# Altium PCB LM-003.PcbDoc
Units mil, origin at the board's own origin, x right, y up, seen from the top; angles counter-clockwise.
Board outline 2625 x 8500 mil, 8 copper layers (Top Layer, Mid-Layer 1, Internal Plane 1, Internal Plane 2, Internal Plane 3, Internal Plane 4, Mid-Layer 2, Bottom Layer), stack 49 mil thick; 1 components, 284 nets, 8 pads, 0 vias.
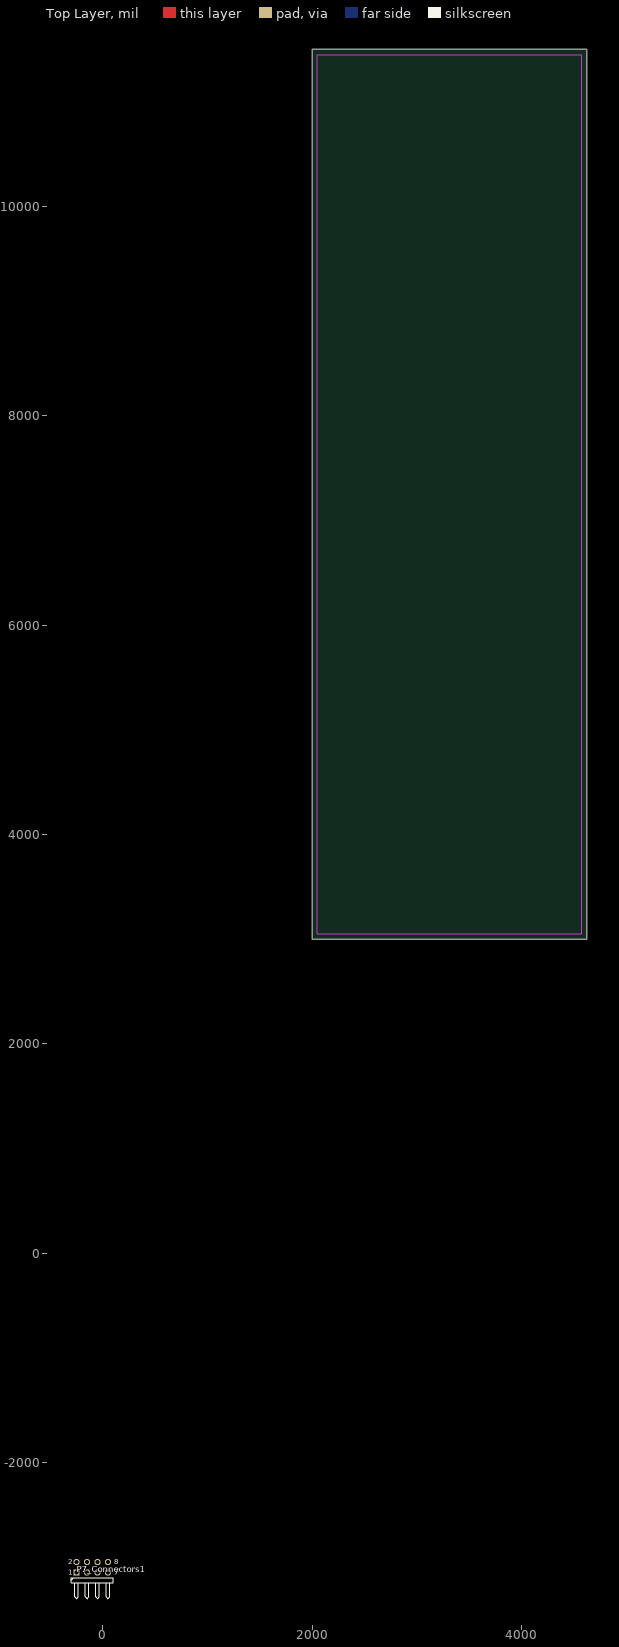
[diagram p0: Top Layer view]
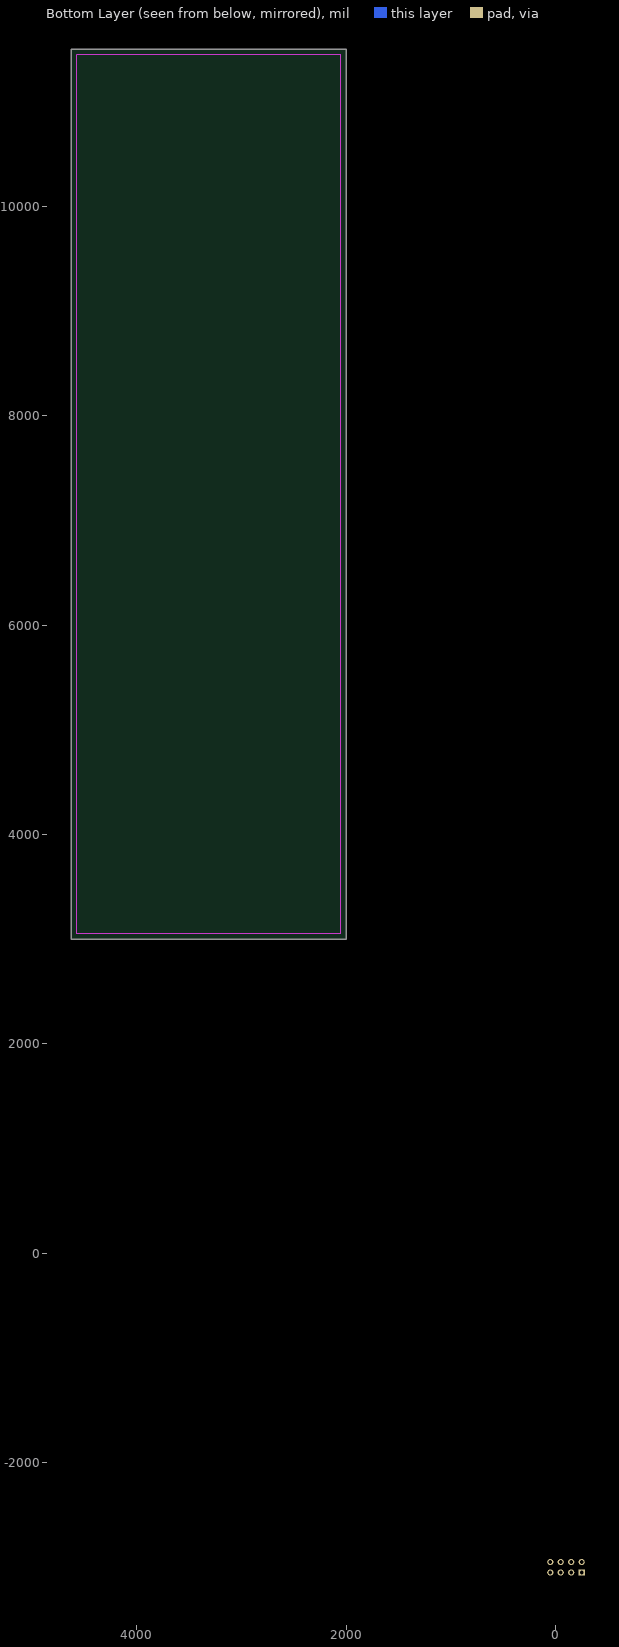
[diagram p1: Bottom Layer view, seen from below]
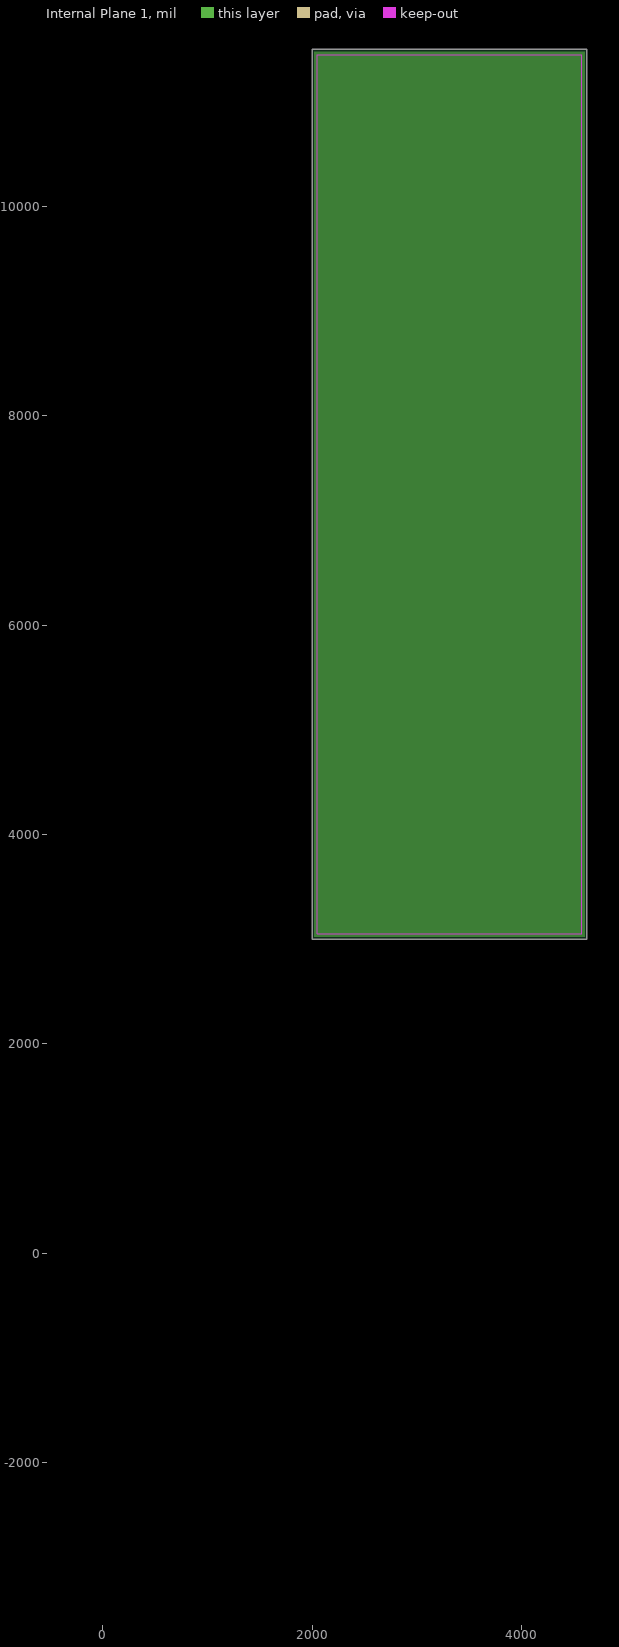
[diagram p2: Internal Plane 1, clearances drawn from the general rule]
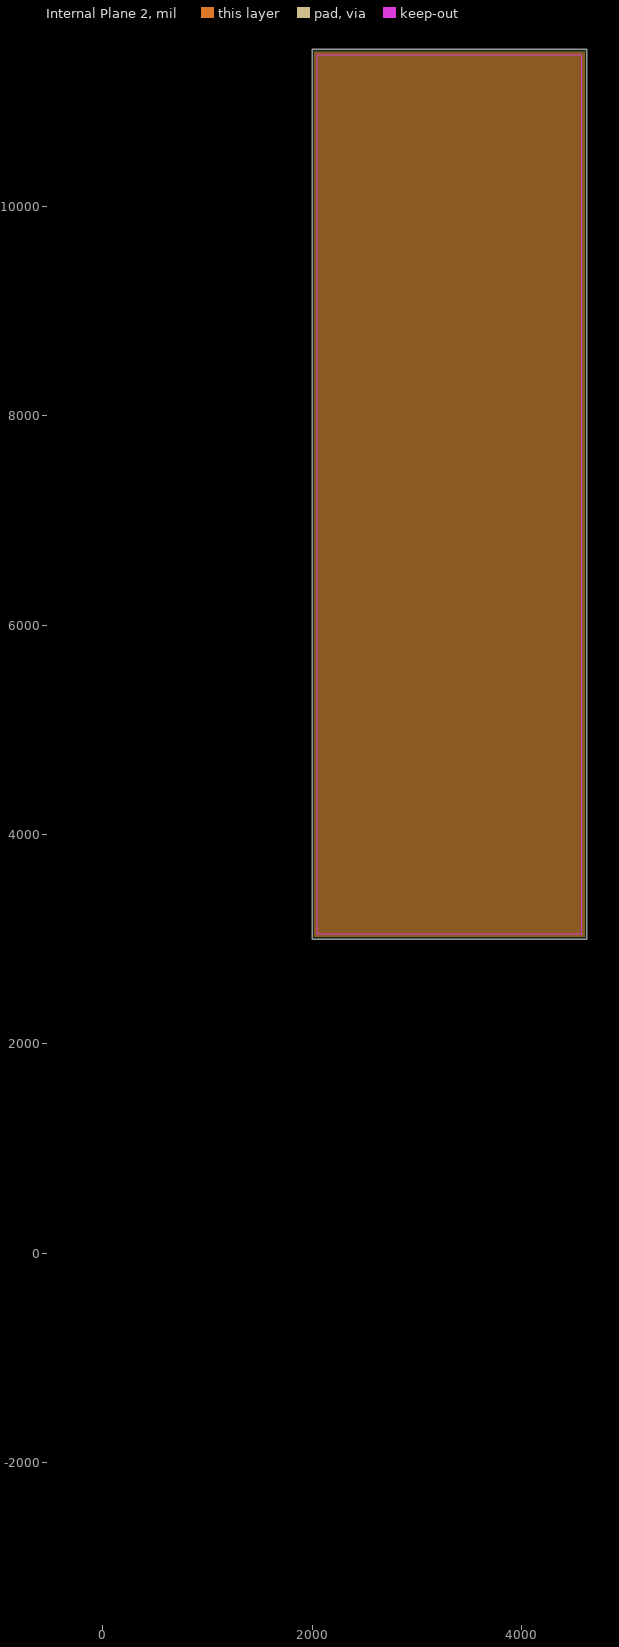
[diagram p3: Internal Plane 2, clearances drawn from the general rule]
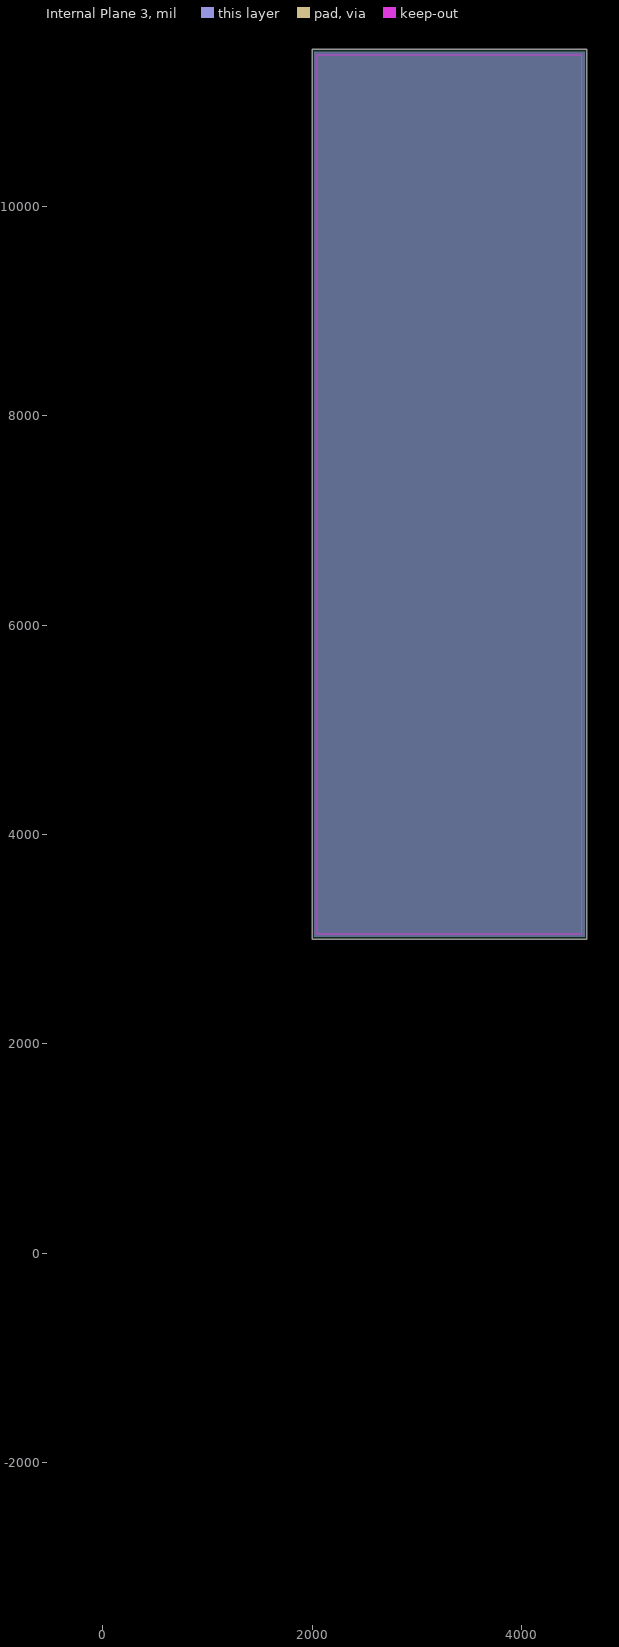
[diagram p4: Internal Plane 3, clearances drawn from the general rule]
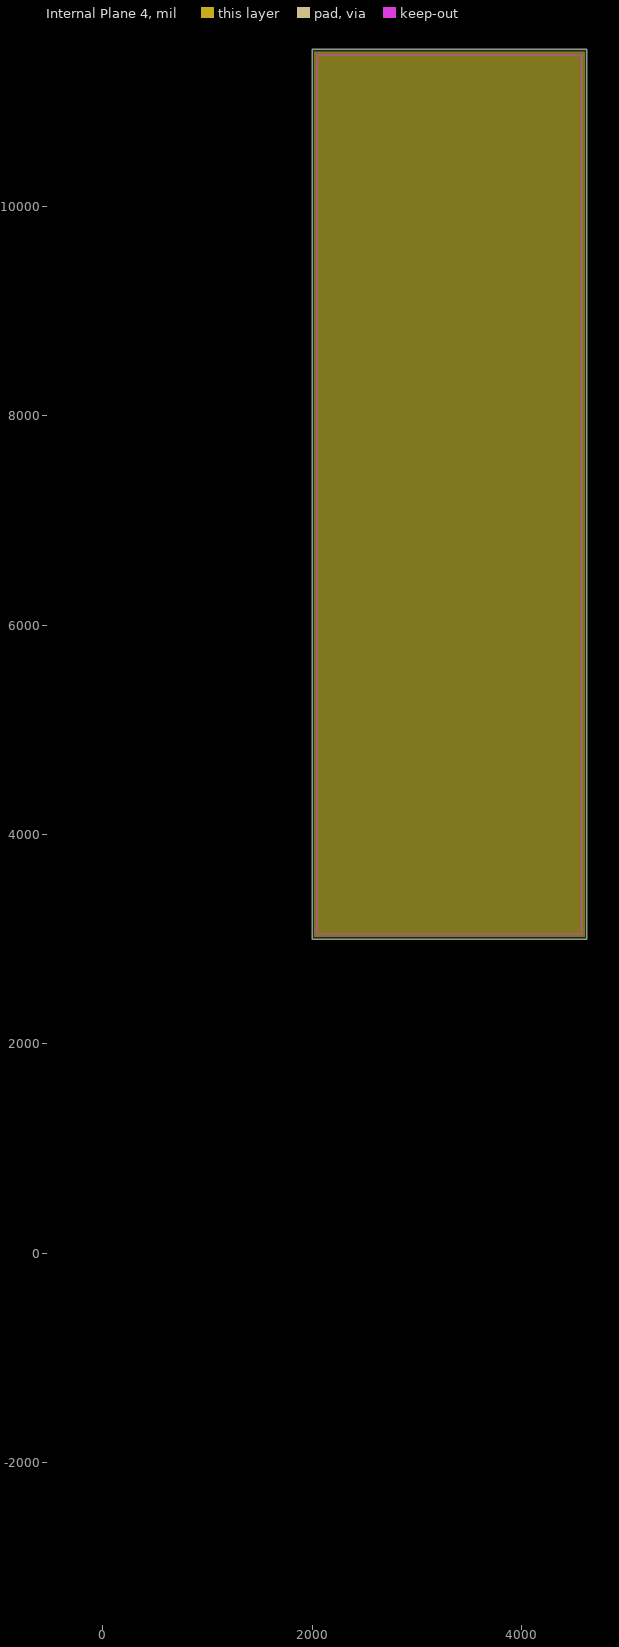
[diagram p5: Internal Plane 4, clearances drawn from the general rule]

## Layer stack, top to bottom
Top Solder: solder mask 0.4, Solder Resist, Dk 3.5
Top Layer: signal copper 1.4
Dielectric 1: dielectric 12.6, FR-4, Dk 4.8
Mid-Layer 1: signal copper 1.4
Internal Plane 1: plane copper 1.4
Internal Plane 2: plane copper 1.4
Internal Plane 3: plane copper 1.4
Internal Plane 4: plane copper 1.4
Dielectric2: dielectric 12.6, FR-4, Dk 4.8
Mid-Layer 2: signal copper 1.4
Dielectric3: dielectric 12.6, FR-4, Dk 4.8
Bottom Layer: signal copper 1.4
Bottom Solder: solder mask 0.4, Solder Resist, Dk 3.5

## Board outline
2000,3000 4625,3000 4625,11500 2000,11500

## Design rules (kind name [scope] priority, off if disabled: settings)
Clearance [All] p1: gap=8 ignorepadtopadclearanceinfootprint=FALSE
PlaneClearance [All] p1: clearance=20
PlaneConnect [All] p1: planeconnectstyle=Relief reliefexpansion=20 reliefentries=4 reliefconductorwidth=10 reliefairgap=10
PolygonConnect [All] p1: connectstyle=Relief reliefconductorwidth=10 reliefentries=4 polygonreliefangle="90 Angle" airgapwidth=10
RoutingVias [All] p1: holewidth=25 width=40 viastyle="Through Hole" minholewidth=28 minwidth=50 maxholewidth=28 maxwidth=50
SolderMaskExpansion [All] p1: expansion=4
Width [All] p1: maxlimit=8 minlimit=8 preferedwidth=8
28 further rules are at their usual default settings.

## Classes and differential pairs
channel class "Power Monitor": "Power Monitor1" "Power Monitor2"
channel class heater_control: Designator "Heater Control"
channel class Connectors: Connectors1 Connectors2 I2C
channel class ADC: ADC1 ADC2

## Components (designator, comment, footprint, x,y, rotation, side; value= is the part's Value field where it differs from the comment)
P7_Connectors1 "IPL1-104-01-L-S-RA-K" HDR2X4H -250,-3050 r0 top (schematic designator P7)

## Footprints (in the part's own frame and the unit in brackets; to place one, negate y for a bottom-side part, rotate by r counter-clockwise, add the part's x,y. Pads: shape width x height; smd on the part's side, far side on the other; paste and mask are expansions set on the pad)
HDR2X4H [mm] "Connector; Header; 4x2 Position; Right Angle"
  rect 1.5x1.5 hole 0.9: 1(0,0)
  round 1.5 hole 0.9: 2(0,2.54) 3(2.54,0) 4(2.54,2.54) 5(5.08,0) 6(5.08,2.54) 7(7.62,0) 8(7.62,2.54)
  silkscreen extent -1.27,-6.35 8.89,-1.27

## Part data
P7_Connectors1: library part "Header 4X2H", "Header, 4-Pin, Dual row, Right Angle", Current Rating=-, Insulation Color=Natural, Manufacturer 1="Samtec Inc.", Material Flammability Rating="UL94 V-0", Operating Temperature="-55°C ~ 125°C", Supplier Part Number 1=SAM9597-ND, Voltage Rating="675VAC, 954VDC", Applications=-, Category 1="Connectors, Interconnects", ComponentLink1Description=http://suddendocs.samtec.com/prints/ipl1-1xx-xx-xxx-s-xx-x-xx-mkt.pdf, ComponentLink1URL=http://suddendocs.samtec.com/prints/ipl1-1xx-xx-xxx-s-xx-x-xx-mkt.pdf, Connector Type=Header, Contact Finish - Mating=Gold, Contact Finish - Post=Tin, Contact Finish Thickness - Mating="10µin (0.25µm)", Contact Finish Thickness - Post=-, Contact Length - Mating="0.215\" (5.46mm)", Contact Length - Post="0.085\" (2.16mm)", Contact Material="Phosphor Bronze", Contact Shape=Square, Contact Type="Male Pin", Description 1=".100 TERMINAL ASSY", Fastening Type="Locking Ramp", Features=-, Ingress Protection=-, Insulation Height="0.240\" (6.10mm)", Insulation Material="Liquid Crystal Polymer (LCP)", Manufacturer Part Number 1=IPL1-104-01-L-S-RA-K, Mated Stacking Heights=-, Mounting Type="Through Hole, Right Angle", Number of Positions=4, Number of Positions Loaded=All, Number of Rows=1, Overall Contact Length=-, Packaging=Tube, Part Status=Active, Pitch - Mating="0.100\" (2.54mm)", Pricing 1="1=2.53, 10=2.424, 25=2.222, 50=2.121, 100=2.02, 250=1.76752, 500=1.717, 1000=1.4645, 2500=1.3635 (USD)", RoHS 1="RoHS Compliant", Row Spacing - Mating=-, Shrouding="Shrouded - 4 Wall", Stock 1=100, Style="Board to Cable/Wire", Supplier 1=Digi-Key, Termination=Solder

## Nets (pads, with @x,y where several pads share a name; then routed paths per layer and width w, separated by ;. In a path a pad name is that pad's centre, name@x,y a point inside that pad or via, vN(x,y) a via of type N, cw(c..) or ccw(c..) an arc to the next point about the centre after c; other vN are vias at no path point)
+3.3: 
"+3.3V_Power Monitor1": 
"+3.3V_Power Monitor2": 
+5: P7_Connectors1.2
"+5 BBB": 
+5V: 
"+5V_Power Monitor1": 
"+5V_Power Monitor2": 
+12_Designator: 
"+12_Power Monitor1": 
"+12_Power Monitor2": 
-5_ADC1: 
-5_Connectors1: 
-5_Connectors2: 
-5_I2C: 
AGND_ADC1: 
"AIN0_Power Monitor1": 
"AIN0_Power Monitor2": 
"AIN1_Power Monitor1": 
"AIN1_Power Monitor2": 
"AIN2_Power Monitor1": 
"AIN2_Power Monitor2": 
"AIN3_Power Monitor1": 
"AIN3_Power Monitor2": 
"AIN4_Power Monitor1": 
"AIN4_Power Monitor2": 
"AIN6_Power Monitor1": 
"AIN6_Power Monitor2": 
"Arrestment Thermistor_ADC1": 
"Arrestment Thermistor_ADC2": 
"Arrestment Thermistor_Connectors1": 
"Arrestment Thermistor_Connectors2": 
"Arrestment Thermistor_I2C": 
Arrestment_HTR_OUT_Connectors1: 
Arrestment_HTR_OUT_Connectors2: 
Arrestment_HTR_OUT_Designator: 
"Arrestment_HTR_OUT_Heater Control": 
Arrestment_HTR_OUT_I2C: 
Aux+_Connectors1: 
Aux+_Connectors2: 
Aux+_I2C: 
Batt+_Connectors1: 
Batt+_Connectors2: 
Batt+_I2C: 
"Batt_Power Monitor1": 
"Batt_Power Monitor2": 
BBB_PWR_SW: 
BBB_PWR_SW_Connectors1: 
BBB_PWR_SW_Connectors2: 
BBB_PWR_SW_I2C: 
"Beam Sync Demod Out_ADC1": 
"Beam Sync Demod Out_ADC2": 
BEAM_Connectors1: 
BEAM_Connectors2: 
BEAM_I2C: 
CH0_ADC1: 
CH0_ADC2: 
CH1_ADC1: 
CH1_ADC2: 
CH2_ADC1: 
CH2_ADC2: 
"Conning Tower Thermistor_ADC1": 
"Conning Tower Thermistor_ADC2": 
"Conning Tower Thermistor_Connectors1": 
"Conning Tower Thermistor_Connectors2": 
"Conning Tower Thermistor_I2C": 
CT_HTR_OUT_Connectors1: 
CT_HTR_OUT_Connectors2: 
CT_HTR_OUT_Designator: 
"CT_HTR_OUT_Heater Control": 
CT_HTR_OUT_I2C: 
DCAN1_RX: 
DCAN1_TX: 
DGND: P7_Connectors1.8
"eQEPOB/GPIO 3-19": 
GB_HTR_OUT_Connectors1: 
GB_HTR_OUT_Connectors2: 
GB_HTR_OUT_Designator: 
"GB_HTR_OUT_Heater Control": 
GB_HTR_OUT_I2C: 
"Gearbox Thermistor_ADC1": 
"Gearbox Thermistor_ADC2": 
"Gearbox Thermistor_Connectors1": 
"Gearbox Thermistor_Connectors2": 
"Gearbox Thermistor_I2C": 
GND_ADC: 
"GPIO 0-10": 
"GPIO 0-11": 
"GPIO 0-20": 
"GPIO 1-0": 
"GPIO 1-4": 
"GPIO 1-5": 
"GPIO 1-16": 
"GPIO 1-17": 
"GPIO 1-28": 
"GPIO 1-29": 
"GPIO 1-30": 
"GPIO 2-2": 
"GPIO 2-3": 
"GPIO 2-4": 
"GPIO 2-5": 
"GPIO 2-22": 
"GPIO 2-23": 
"GPIO 2-24": 
"GPIO 2-25": 
"GPIO 3-21": 
HTR_GND_Designator: 
I2C2_SCL: 
I2C2_SDA: 
IC_HTR_OUT_Connectors1: 
IC_HTR_OUT_Connectors2: 
IC_HTR_OUT_Designator: 
"IC_HTR_OUT_Heater Control": 
IC_HTR_OUT_I2C: 
"Lid Thermistor_Connectors1": 
"Lid Thermistor_Connectors2": 
"Lid Thermistor_I2C": 
"Lid Thermistor_Power Monitor1": 
"Lid Thermistor_Power Monitor2": 
"Meter Thermistor 1_ADC1": 
"Meter Thermistor 1_ADC2": 
"Meter Thermistor 1_Connectors1": 
"Meter Thermistor 1_Connectors2": 
"Meter Thermistor 1_I2C": 
"Meter Thermistor 2_ADC1": 
"Meter Thermistor 2_ADC2": 
"Meter Thermistor 2_Connectors1": 
"Meter Thermistor 2_Connectors2": 
"Meter Thermistor 2_I2C": 
METER_HTR_OUT_Connectors1: 
METER_HTR_OUT_Connectors2: 
METER_HTR_OUT_Designator: 
"METER_HTR_OUT_Heater Control": 
METER_HTR_OUT_I2C: 
NetC15_ADC1_1: 
NetC15_ADC2_1: 
NetC21_ADC1_1: 
NetC21_ADC2_1: 
NetDS1_Designator_2: 
"NetDS1_Heater Control_2": 
NetDS2_1: 
NetDS2_2: 
NetLED1_Designator_K: 
"NetLED1_Heater Control_K": 
NetLED2_Designator_K: 
"NetLED2_Heater Control_K": 
NetLED3_Designator_K: 
"NetLED3_Heater Control_K": 
NetLED4_Designator_K: 
"NetLED4_Heater Control_K": 
NetP1_Connectors1_3: 
NetP1_Connectors1_4: 
NetP1_Connectors1_5: 
NetP1_Connectors2_3: 
NetP1_Connectors2_4: 
NetP1_I2C_3: 
NetP1_I2C_4: 
NetP1_I2C_5: 
NetP3_27: 
NetP6_Connectors1_2: 
NetP6_Connectors1_3: 
NetP6_Connectors2_2: 
NetP6_Connectors2_3: 
NetP6_I2C_2: 
NetP7_Connectors1_4: P7_Connectors1.4
NetP7_Connectors2_4: 
NetP7_I2C_4: 
NetP8-BB_3: 
NetP8-BB_4: 
NetP8-BB_5: 
NetP8-BB_6: 
NetP8-BB_14: 
NetP8_Connectors1_2: 
NetP8_Connectors1_3: 
NetP8_Connectors2_2: 
NetP8_Connectors2_3: 
NetP8_I2C_2: 
NetP9-BB_17: 
NetP9-BB_18: 
NetP9-BB_21: 
NetP9-BB_22: 
NetP9-BB_38: 
NetP9_Connectors1_2: 
NetP9_Connectors1_3: 
NetP9_Connectors2_2: 
NetP9_Connectors2_3: 
NetP9_I2C_2: 
NetP15_Connectors1_1: 
NetP15_Connectors2_1: 
NetP15_I2C_1: 
NetP16_Connectors2_1: 
NetP16_Connectors2_2: 
NetP16_I2C_1: 
NetP16_I2C_2: 
NetQ1_Designator_1: 
"NetQ1_Heater Control_1": 
NetQ2_Designator_1: 
"NetQ2_Heater Control_1": 
NetQ3_Designator_1: 
"NetQ3_Heater Control_1": 
NetQ4_Designator_1: 
"NetQ4_Heater Control_1": 
NetQ5_Designator_1: 
"NetQ5_Heater Control_1": 
"NetR8_Heater Control_1": 
NetR9_Designator_1: 
"NetR26_Heater Control_1": 
NetR32_Designator_1: 
"NetR36_Power Monitor1_1": 
"NetR36_Power Monitor2_1": 
"NetR37_Power Monitor1_1": 
"NetR37_Power Monitor2_1": 
NetR39_ADC1_1: 
NetR39_ADC2_1: 
"NetR42_Power Monitor1_2": 
"NetR42_Power Monitor2_2": 
"NetR43_Power Monitor1_1": 
"NetR43_Power Monitor2_1": 
"NetR45_Power Monitor1_1": 
"NetR45_Power Monitor2_1": 
"NetR57_Heater Control_1": 
NetR58_ADC1_1: 
NetR58_ADC2_1: 
NetU5_ADC1_11: 
NetU5_ADC1_12: 
NetU5_ADC1_13: 
NetU5_ADC2_10: 
NetU5_ADC2_11: 
NetU5_ADC2_12: 
"PLATE A_Connectors1": 
"PLATE A_Connectors2": 
"PLATE A_I2C": 
"PLATE B_Connectors1": 
"PLATE B_Connectors2": 
"PLATE B_I2C": 
PWM1A: 
PWM1B: 
PWM2A: 
PWM2B: 
PWM_Connectors1: 
PWM_Connectors2: 
PWM_I2C: 
PWR_GND_Connectors1: 
RXD: 
SERIAL4_RX: 
SERIAL4_TX: 
SERIAL5_RX: 
SERIAL5_TX: 
SPI1_CS0_Connectors1: P7_Connectors1.1
SPI1_CS0_Connectors2: 
SPI1_CS0_I2C: 
SPI1_CS1: 
SPI1_MISO_Connectors1: P7_Connectors1.5
SPI1_MISO_Connectors2: 
SPI1_MISO_I2C: 
SPI1_MOSI_Connectors1: P7_Connectors1.3
SPI1_MOSI_Connectors2: 
SPI1_MOSI_I2C: 
SPI1_SCLK_Connectors1: P7_Connectors1.7
SPI1_SCLK_Connectors2: 
SPI1_SCLK_I2C: 
"Thermistor 1_ADC1": 
"Thermistor 1_ADC2": 
"Thermistor 2_ADC1": 
"Thermistor 2_ADC2": 
"Thermistor 3_ADC1": 
"Thermistor 3_ADC2": 
"Thermistor 4_ADC1": 
"Thermistor 4_ADC2": 
"Thermistor 5_ADC1": 
"Thermistor 5_ADC2": 
TXD: 
VCC_2V85: 
VDD_ADC: 
ZH_Connectors1: 
ZH_Connectors2: 
ZH_I2C: 
"ZH_Power Monitor1": 
"ZH_Power Monitor2": 
ZP_ADC1: 
ZP_ADC2: 
ZP_Connectors1: 
ZP_Connectors2: 
ZP_I2C: 
pads on no net: P7_Connectors1.6

## Keep-outs
Keep-Out Layer:
  lines w10: 2050,3050 4575,3050 4575,11450 2050,11450 2050,3050

## Dimensions
2050,3050 to 4575,3050 on Mechanical 1
2050,3050 to 2050,11450 on Mechanical 1

## Text inside footprints (layer, text, board x,y; h text height)
P7_Connectors1: Top Overlay "8" at 110,-2970 h50; Top Overlay "7" at 110,-3070 h50; Top Overlay "1" at -330,-3070 h50; Top Overlay "2" at -330,-2970 h50